# Altium PCB Infrared.PcbDoc
Units mm, origin at the board's own origin, x right, y up, seen from the top; angles counter-clockwise.
Board outline 152.4 x 101.6 mm, 2 copper layers (Top Layer, Bottom Layer); 14 components, 7 nets, 35 pads, 6 vias.
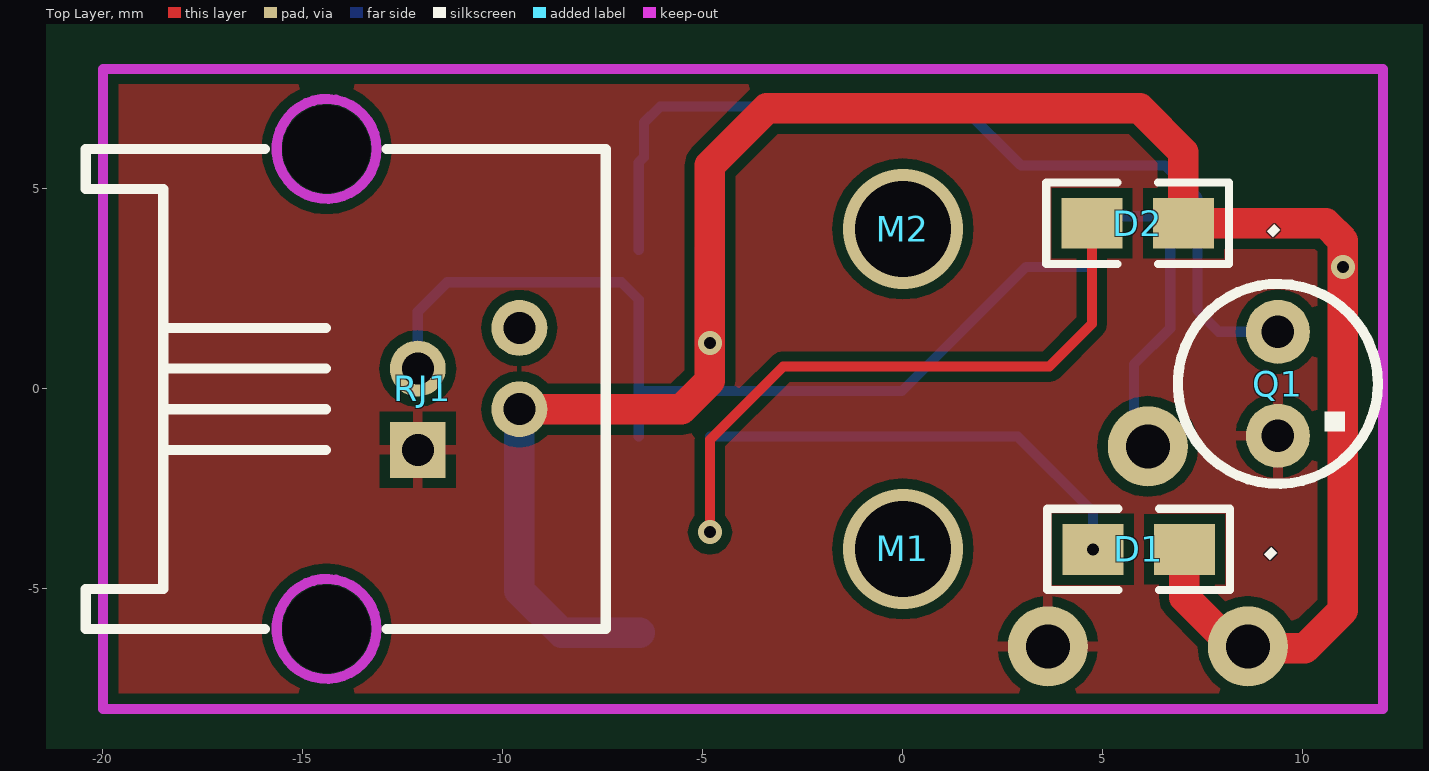
[diagram p0: Top Layer view]
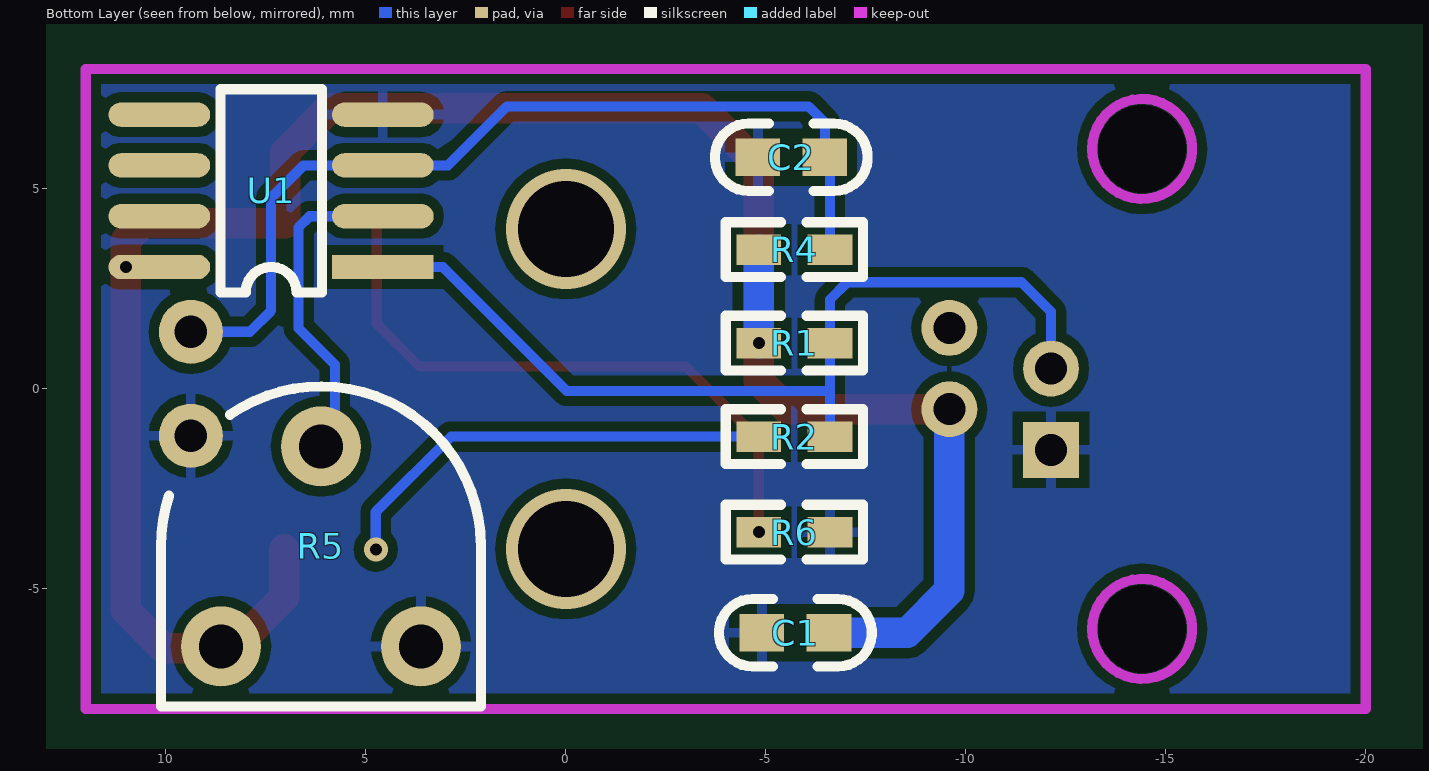
[diagram p1: Bottom Layer view, seen from below]
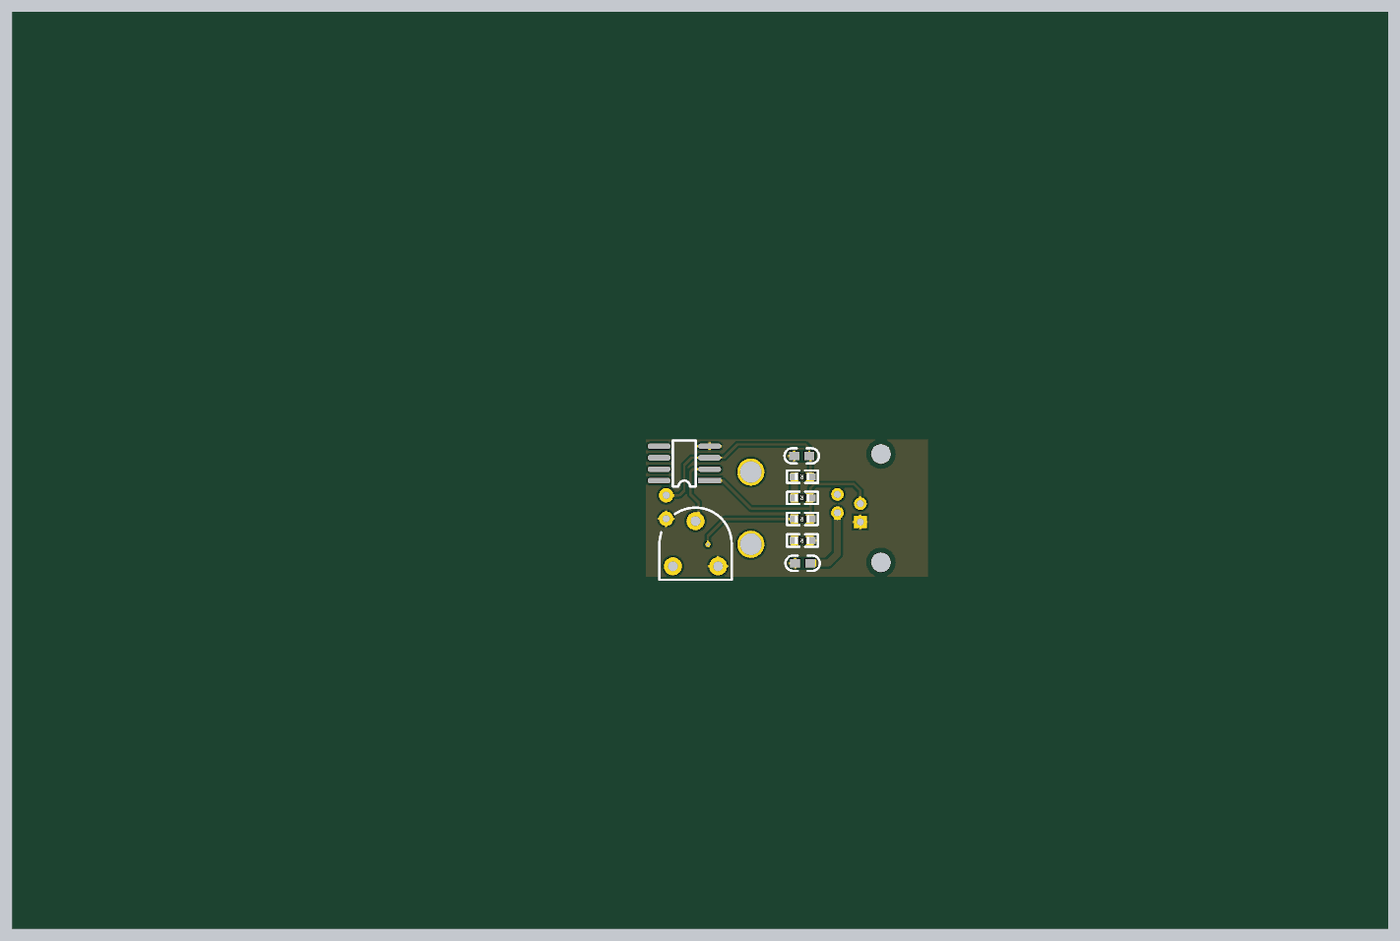
[diagram p2: 3D render of the assembled board from below, using the file's embedded part models]

## Layer stack, top to bottom
Top Solder: solder mask 0.0102, Solder Resist, Dk 3.5
Top Layer: signal copper 0.0356
Dielectric 1: dielectric 0.32, FR-4, Dk 4.8
Bottom Layer: signal copper 0.0356
Bottom Solder: solder mask 0.0102, Solder Resist, Dk 3.5

## Board outline
-70.6,-46.6 81.8,-46.6 81.8,55 -70.6,55

## Design rules (kind name [scope] priority, off if disabled: settings)
Clearance [All] p1: gap=0.254
PolygonConnect [All] p1: connectstyle=Relief reliefconductorwidth=0.254 reliefentries=4 polygonreliefangle="90 Angle" airgapwidth=0.254
RoutingVias [All] p1: holewidth=0.711 width=1.27 viastyle="Through Hole" minholewidth=0.711 minwidth=1.27 maxholewidth=0.711 maxwidth=1.27
SolderMaskExpansion [All] p1: expansion=0.102
Width [All] p1: maxlimit=2.54 minlimit=0.254 preferedwidth=0.254
29 further rules are at their usual default settings.

## Components (designator, comment, footprint, x,y, rotation, side; value= is the part's Value field where it differs from the comment)
C1 "Cap" 0603_C -5.74,-6.096 r270 bottom
C2 "Cap" 0603_C -5.639,5.791 r270 bottom
D1 "LED" 0805 7.036,-4.013 r180 top
D2 "LED" 0805 7.01,4.14 r180 top
M1 "M2" M2 0,-4 r0 top
M2 "M2" M2 0,4 r0 top
Q1 "Photo NPN" 红外 9.246,0 r270 top
R1 "Res2" 0603_R -5.715,1.143 r270 bottom
R2 "Res2" 0603_R -5.715,-1.194 r270 bottom
R4 "Res2" 0603_R -5.715,3.48 r270 bottom
R5 "RPot" 电位器 6.121,-3.937 r0 bottom
R6 "Res2" 0603_R -5.715,-3.581 r270 bottom
RJ1 "RJ11" RJ11 -12,0 r90 top
U1 "LM393" SO-8 7.366,4.953 r270 bottom

## Footprints (in the part's own frame and the unit in brackets; to place one, negate y for a bottom-side part, rotate by r counter-clockwise, add the part's x,y. Pads: shape width x height; smd on the part's side, far side on the other; paste and mask are expansions set on the pad)
0603_C [mil]
  rect 37x44 smd: 1(0,-33) 2(0,33)
  silkscreen extent -33,-75 33,75
0603_R [mil]
  rect 30x44 smd: 1(0,35) 2(0,-35)
  silkscreen extent -27,-68 27,68, body extent -19,-52 20,50, height 21
0805 [mil]
  rect 60x50 smd: 1(0,0) 2(90,0)
  silkscreen extent -45,-40 135,40
M2 [mm]
RJ11 [mm]
  round 2.1 hole 2.2 unplated: 0(-6,2.41) 0(6,2.41)
  rect 1.397x1.397 hole 0.8: 1(-1.524,0.13)
  round 1.397 hole 0.8: 2(-0.508,-2.41) 3(0.508,0.13) 4(1.524,-2.41)
  Keep-Out Layer circle w0.254: c6,2.41 r1.25
  Keep-Out Layer circle w0.254: c-6,2.41 r1.25
  silkscreen extent -6,-4.57 6,8.43
SO-8 [mil]
  rect 24x100 smd: 1(75,110)
  oval 24x100 smd: 2(25,110) 3(-25,110) 4(-75,110) 5(-75,-110) 6(-25,-110) 7(25,-110) 8(75,-110)
  silkscreen extent -100,-50 100,50
电位器 [mm]
  round 2 hole 1.1: 1(-2.5,2.5) 2(2.5,2.5) 3(0,-2.5)
  silkscreen extent -4,-4 4,4
红外 [mm]
  round 1.6 hole 0.813: 1(1.173,0.127) 2(-1.427,0.127)
  silkscreen extent -2.63,-2.37 2.37,2.63

## Part data
C1 C2: "Capacitor"
D1 D2: library part LED1, "Typical RED GaAs LED"
M1 M2: library part M3
Q1: "NPN Phototransistor"
R1 R2 R4 R6: "Resistor"
R5: "Potentiometer"

## Via types
v1: diameter 0.6, hole 0.3, Top Layer to Bottom Layer, 4 vias
v2: diameter 3, hole 2.4, Top Layer to Bottom Layer, 2 vias

## Nets (pads, with @x,y where several pads share a name; then routed paths per layer and width w, separated by ;. In a path a pad name is that pad's centre, name@x,y a point inside that pad or via, vN(x,y) a via of type N, cw(c..) or ccw(c..) an arc to the next point about the centre after c; other vN are vias at no path point)
A+: C2.2 Q1.2 R4.1 U1.3 | length 23.2
  Bottom Layer w0.254: R4.1 -6.604,5.664 C2.2 -6.477,6.655 -6.071,7.061 1.473,7.061 2.946,5.588 U1.3 6.553,5.588 7.366,4.775 7.366,1.956 7.895,1.427 Q1.2
A-: R5.3 U1.2 | length 8.2
  Bottom Layer w0.254: U1.2 6.401,4.318 6.68,4.039 6.68,1.517 5.773,0.61 5.773,-1.343 R5.3@5.867,-1.437 ; R5.3@5.773,-1.488 R5.3@5.867,-1.488
GND: C1.1 C2.1 Q1.1 R5.1 R6.1 RJ1.1 U1.4
NetD1_2: D1.2 R2.2 | length 11.3
  Bottom Layer w0.254: R2.2 2.87,-1.194 4.75,-3.073 v1(4.75,-4.013)
NetD2_2: D2.2 R6.2 | length 15.6
  Top Layer w0.254: v1(-4.826,-3.581) -4.826,-1.27 -2.997,0.559 3.658,0.559 4.724,1.626 D2.2
OUT_A: R1.1 R2.1 RJ1.3 U1.1 | length 23.3
  Bottom Layer w0.254: RJ1.3 -12.13,1.93 -11.393,2.667 -7.036,2.667 -6.604,2.235 R1.1 -6.604,0 ; R2.1 -6.604,0 ; U1.1 3.073,3.048 -0.025,-0.051 -6.553,-0.051 -6.604,0
VCC: C1.2 D1.1 D2.1 R1.2 R4.2 R5.2 RJ1.2 U1.8 | length 54.9
  Top Layer w0.762: RJ1.2 -5.537,-0.508 -4.826,0.203 v1(-4.826,1.143) -4.826,5.588 -3.404,7.01 5.918,7.01 7.01,5.918 D2.1 10.566,4.14 10.998,3.708 v1(10.998,3.048) 10.998,-5.537 10.048,-6.488 8.317,-6.488 7.036,-5.207 D1.1
  Bottom Layer w0.762: RJ1.2 -9.59,-5.04 -8.534,-6.096 C1.2 ; v1(-4.826,1.143) R4.2
pads on no net: RJ1.0 RJ1.4 U1.5 U1.6 U1.7
copper on no net:
  other v2: 0,-4 0,4

## Polygon pours and split planes (outlines as drawn)
GND on Top Layer "Top Layer-No Net" (solid, remove dead copper, pour order 12): -21.311,8.738 12.751,8.738 12.802,8.788 13.538,8.052 13.538,-9.296 -20.828,-9.296 -20.98,-9.144
GND on Bottom Layer "Top Layer-No Net" (solid, remove dead copper, pour order 14): -20.93,8.738 -20.726,8.941 12.802,8.941 12.802,-9.093 12.598,-9.296 12.395,-9.093 -20.879,-9.093

## Keep-outs
Keep-Out Layer:
  lines w0.254: -20,-8 -20,8 12,8 12,-8 -20,-8

## Silkscreen, mask and mechanical layers (free items; w line width, h text height)
Top Overlay:
  text "." at 8.941,4.089 h1.52 r315
  text "." at 8.865,-3.988 h1.52 r315

## Text inside footprints (layer, text, board x,y; h text height)
RJ1: Mechanical 1 "4" at -19.002,1.524 h1 r270; Mechanical 1 "1" at -19.002,-2.032 h1 r270; Mechanical 1 "4" at -8.842,1.27 h1 r270; Mechanical 1 "3" at -14.43,0.254 h1 r270; Mechanical 1 "2" at -8.842,-0.762 h1 r270; Mechanical 1 "1" at -14.43,-1.778 h1 r270